# EAGLE board CT_schematic (EAGLE 7.6.0)

Size 100 x 80 mm. Coordinates in mm from the lower left corner, seen from the top.
Outline: 0,0 100,0 100,80 0,80 0,0
Copper layers (1*16): Top 0.035mm / dielectric 1.5mm / Bottom 0.035mm
Design rules "default": minimum track width 10mil, minimum drill 24mil, track to track 8mil, track to pad 8mil, pad to pad 8mil, via to via 8mil, smd to smd 8mil, copper to edge 40mil, drill to drill 8mil, minimum pad ring 10mil, minimum via ring 8mil, stop-mask expansion 4mil, vias tented up to drill 0mil, thermal gap 10mil

## Footprints (pad centres in the part's own frame; a part is rotated, then mirrored left to right if it is on the bottom)
C0603 = smd 0.8 x 0.8: 1 -0.762,0; 2 0.762,0
C0402 = smd 0.5 x 0.5: 1 -0.508,0; 2 0.508,0
C0805 = smd 1.2 x 1.3: 1 -1.016,0; 2 1.016,0
C1210 = smd 1.2 x 2.5: 1 -1.524,0; 2 1.524,0
R0603 = smd 0.8 x 0.8: 1 -0.762,0; 2 0.762,0
EXV-9H = smd 3.505 x 1.676: 1 -2.857,0; 2 2.857,0
L0603 = smd 0.8 x 0.8: 1 -0.762,0; 2 0.762,0
IND25X25CZ = smd 2.489 x 3.429: 1 -2.718,0; 2 2.718,0
PJ-037B_PACKAGE = drill 3.7 square: 1 12,0 | drill 3.2 square: 2 6,0
UFBGA100 = smd 0.28 x 0.28: A1 -2.75,2.75; A2 -2.25,2.75; A3 -1.75,2.75; A4 -1.25,2.75; A5 -0.75,2.75; A6 -0.25,2.75; A7 0.25,2.75; A8 0.75,2.75; A9 1.25,2.75; A10 1.75,2.75; A11 2.25,2.75; A12 2.75,2.75; B1 -2.75,2.25; B2 -2.25,2.25; B3 -1.75,2.25; B4 -1.25,2.25; B5 -0.75,2.25; B6 -0.25,2.25; B7 0.25,2.25; B8 0.75,2.25; B9 1.25,2.25; B10 1.75,2.25; B11 2.25,2.25; B12 2.75,2.25; C1 -2.75,1.75; C2 -2.25,1.75; C3 -1.75,1.75; C4 -1.25,1.75; C5 -0.75,1.75; C8 0.75,1.75; C9 1.25,1.75; C10 1.75,1.75; C11 2.25,1.75; C12 2.75,1.75; D1 -2.75,1.25; D2 -2.25,1.25; D3 -1.75,1.25; D10 1.75,1.25; D11 2.25,1.25; D12 2.75,1.25; E1 -2.75,0.75; E2 -2.25,0.75; E3 -1.75,0.75; E10 1.75,0.75; E11 2.25,0.75; E12 2.75,0.75; F1 -2.75,0.25; F2 -2.25,0.25; F11 2.25,0.25; F12 2.75,0.25; G1 -2.75,-0.25; G2 -2.25,-0.25; G11 2.25,-0.25; G12 2.75,-0.25; H1 -2.75,-0.75; H2 -2.25,-0.75; H3 -1.75,-0.75; H10 1.75,-0.75; H11 2.25,-0.75; H12 2.75,-0.75; J1 -2.75,-1.25; J2 -2.25,-1.25; J3 -1.75,-1.25; J10 1.75,-1.25; J11 2.25,-1.25; J12 2.75,-1.25; K1 -2.75,-1.75; K2 -2.25,-1.75; K3 -1.75,-1.75; K4 -1.25,-1.75; K5 -0.75,-1.75; K8 0.75,-1.75; K9 1.25,-1.75; K10 1.75,-1.75; K11 2.25,-1.75; K12 2.75,-1.75; L1 -2.75,-2.25; L2 -2.25,-2.25; L3 -1.75,-2.25; L4 -1.25,-2.25; L5 -0.75,-2.25; L6 -0.25,-2.25; L7 0.25,-2.25; L8 0.75,-2.25; L9 1.25,-2.25; L10 1.75,-2.25; L11 2.25,-2.25; L12 2.75,-2.25; M1 -2.75,-2.75; M2 -2.25,-2.75; M3 -1.75,-2.75; M4 -1.25,-2.75; M5 -0.75,-2.75; M6 -0.25,-2.75; M7 0.25,-2.75; M8 0.75,-2.75; M9 1.25,-2.75; M10 1.75,-2.75; M11 2.25,-2.75; M12 2.75,-2.75
SSOP-28 = smd 1.5 x 0.4: 1 -3.625,4.225; 2 -3.625,3.575; 3 -3.625,2.925; 4 -3.625,2.275; 5 -3.625,1.625; 6 -3.625,0.975; 7 -3.625,0.325; 8 -3.625,-0.325; 9 -3.625,-0.975; 10 -3.625,-1.625; 11 -3.625,-2.275; 12 -3.625,-2.925; 13 -3.625,-3.575; 14 -3.625,-4.225; 15 3.625,-4.225; 16 3.625,-3.575; 17 3.625,-2.925; 18 3.625,-2.275; 19 3.625,-1.625; 20 3.625,-0.975; 21 3.625,-0.325; 22 3.625,0.325; 23 3.625,0.975; 24 3.625,1.625; 25 3.625,2.275; 26 3.625,2.925; 27 3.625,3.575; 28 3.625,4.225
FCI_10118193-0001LF = smd 0.4 x 1.35: 1 -1.3,2.675; 2 -0.65,2.675; 3 0,2.675; 4 0.65,2.675; 5 1.3,2.675 | smd 1.6 x 1.4: 6 -3.2,2.45; 7 3.2,2.45 | smd 1.9 x 1.9: 8 -1.2,0; 9 1.2,0 | hole 0.5: -3.3,0; 3.3,0
SAMTEC_FTSH-105-01-L-DV-K = smd 0.762 x 2.794: 1 -2.54,-2.032; 2 -2.54,2.032; 3 -1.27,-2.032; 4 -1.27,2.032; 5 0,-2.032; 6 0,2.032; 7 1.27,-2.032; 8 1.27,2.032; 9 2.54,-2.032; 10 2.54,2.032
VFBGA-63 = smd 0.4 x 0.4: A1 -3.6,4.4; A2 -2.8,4.4; A9 2.8,4.4; A10 3.6,4.4; B1 -3.6,3.6; B9 2.8,3.6; B10 3.6,3.6; C3 -2,2.8; C4 -1.2,2.8; C5 -0.4,2.8; C6 0.4,2.8; C7 1.2,2.8; C8 2,2.8; D3 -2,2; D4 -1.2,2; D5 -0.4,2; D6 0.4,2; D7 1.2,2; D8 2,2; E3 -2,1.2; E4 -1.2,1.2; E5 -0.4,1.2; E6 0.4,1.2; E7 1.2,1.2; E8 2,1.2; F3 -2,0.4; F4 -1.2,0.4; F5 -0.4,0.4; F6 0.4,0.4; F7 1.2,0.4; F8 2,0.4; G3 -2,-0.4; G4 -1.2,-0.4; G5 -0.4,-0.4; G6 0.4,-0.4; G7 1.2,-0.4; G8 2,-0.4; H3 -2,-1.2; H4 -1.2,-1.2; H5 -0.4,-1.2; H6 0.4,-1.2; H7 1.2,-1.2; H8 2,-1.2; J3 -2,-2; J4 -1.2,-2; J5 -0.4,-2; J6 0.4,-2; J7 1.2,-2; J8 2,-2; K3 -2,-2.8; K4 -1.2,-2.8; K5 -0.4,-2.8; K6 0.4,-2.8; K7 1.2,-2.8; K8 2,-2.8; L1 -3.6,-3.6; L2 -2.8,-3.6; L9 2.8,-3.6; L10 3.6,-3.6; M1 -3.6,-4.4; M2 -2.8,-4.4; M9 2.8,-4.4; M10 3.6,-4.4
QFN65P400X400X100-17N = smd 1.016 x 0.356: 1 -1.803,0.965; 2 -1.803,0.33; 3 -1.803,-0.33; 4 -1.803,-0.965; 9 1.803,-0.965; 10 1.803,-0.33; 11 1.803,0.33; 12 1.803,0.965 | smd 0.356 x 1.016: 5 -0.965,-1.803; 6 -0.33,-1.803; 7 0.33,-1.803; 8 0.965,-1.803; 13 0.965,1.803; 14 0.33,1.803; 15 -0.33,1.803; 16 -0.965,1.803 | smd 2.108 x 2.108: 17 0,0
HTSS-105-01-G-D = drill 1 pad 1.8 square: 1 0,0 | drill 1 pad 1.8: 2 0,2.54; 3 2.54,0; 4 2.54,2.54; 5 5.08,0; 6 5.08,2.54; 7 7.62,0; 8 7.62,2.54; 9 10.16,0; 10 10.16,2.54
ABLS-25.000MHZ-B2F-T = smd 5.6 x 2.8: 1 -3.81,0; 2 5.69,0
ASEK = smd 1.4 x 1: 1 -1.1,-0.8; 2 1.1,-0.8; 3 1.1,0.8; 4 -1.1,0.8
ASFL1 = smd 1.7 x 1.5: 1 -1.27,-1.1; 2 1.27,-1.1; 3 1.27,1.1; 4 -1.27,1.1
IR3899MTR1PBF = smd 0.25 x 0.75: 1 0,0; 2 0.5,0; 3 1,0; 4 1.5,0; 5 2,0; 6 2.5,0; 7 3,0 | smd 0.75 x 0.25: 8 3.425,0.78; 9 3.425,1.28; 10 3.425,1.78; 14 -0.425,1.78; 15 -0.425,1.28; 16 -0.425,0.78 | smd 0.3 x 1.95: 11 3.22,3.63 | smd 1.62 x 2.42: 12 1.786,3.8 | smd 1 x 1.95: 13 0.117,3.63 | smd 2.19 x 1.25: 17 1.51,1.26
SON-6 = smd 0.55 x 0.3: 1 -0.355,0.5 | smd 0.52 x 0.3: 2 -0.37,0; 3 -0.37,-0.5; 4 0.37,-0.5; 5 0.37,0; 6 0.37,0.5
SW_4-1437565-2 = smd 1.4 x 2.1: 1 -2.23,4.55; 2 -2.23,-4.55; 3 2.23,4.55; 4 2.23,-4.55
LGM67K-G1J2-24-Z = smd 0.8 x 1.4: A -2,0; C 0,0
NC7SZ125M5X = smd 1.3 x 0.7: 1 -1.3,0.95; 2 -1.3,0; 3 -1.3,-0.95; 4 1.3,-0.95; 5 1.3,0.95

## Placement (x,y rotation side)
C1  1e-06  [C0603]  -71.12,73.66 0 top  (outside the outline)
C2  1e-07  [C0603]  -74.93,73.66 0 top  (outside the outline)
C3  1e-07  [C0603]  -78.74,73.66 0 top  (outside the outline)
C4  1e-07  [C0603]  -15.24,78.74 0 top  (outside the outline)
C5  1e-07  [C0603]  -19.05,78.74 0 top  (outside the outline)
C6  1e-07  [C0603]  -22.86,78.74 0 top  (outside the outline)
C7  1e-07  [C0603]  -26.67,78.74 0 top  (outside the outline)
C8  4.7e-06  [C0603]  -59.69,73.66 0 top  (outside the outline)
C9  1e-08  [C0603]  -30.48,78.74 0 top  (outside the outline)
C10  1e-06  [C0603]  -34.29,78.74 0 top  (outside the outline)
C11  1e-11  [C0402]  -80.01,78.74 0 top  (outside the outline)
C12  1e-11  [C0402]  -15.24,83.82 0 top  (outside the outline)
C13  1e-07  [C0402]  -19.05,83.82 0 top  (outside the outline)
C14  4.7e-06  [C0805]  -34.29,62.23 0 top  (outside the outline)
C15  1e-07  [C0402]  -22.86,83.82 0 top  (outside the outline)
C16  1e-07  [C0402]  -26.67,83.82 0 top  (outside the outline)
C17  1e-07  [C0402]  -30.48,83.82 0 top  (outside the outline)
C18  1e-07  [C0402]  -34.29,83.82 0 top  (outside the outline)
C19  1e-07  [C0402]  -38.1,83.82 0 top  (outside the outline)
C20  1e-07  [C0402]  -41.91,83.82 0 top  (outside the outline)
C21  1e-07  [C0402]  -45.72,83.82 0 top  (outside the outline)
C22  2.2e-06  [C0603]  -63.5,73.66 0 top  (outside the outline)
C23  1e-07  [C0402]  -49.53,83.82 0 top  (outside the outline)
C24  1e-07  [C0402]  -53.34,83.82 0 top  (outside the outline)
C25  1e-06  [C0603]  -38.1,78.74 0 top  (outside the outline)
C26  1e-08  [C0402]  -57.15,83.82 0 top  (outside the outline)
C27  1e-08  [C0402]  -60.96,83.82 0 top  (outside the outline)
C28  0.0001  [C1210]  -16.51,63.5 0 top  (outside the outline)
C29  2.2e-06  [C0603]  -67.31,73.66 0 top  (outside the outline)
C30  1e-07  [C0402]  -64.77,83.82 0 top  (outside the outline)
C31  1e-07  [C0402]  -68.58,83.82 0 top  (outside the outline)
C32  8.6453388913681e-09  [R0603]  -44.45,62.23 0 top  (outside the outline)
C33  2.9472746220573e-07  [R0603]  -54.61,62.23 0 top  (outside the outline)
C36  1e-07  [C0402]  -72.39,83.82 0 top  (outside the outline)
C37  0.0001  [EXV-9H]  -17.78,55.88 0 top  (outside the outline)
C38  0.0001  [EXV-9H]  -29.21,55.88 0 top  (outside the outline)
C39  1e-08  [C0402]  -76.2,83.82 0 top  (outside the outline)
C40  1e-08  [C0402]  -80.01,83.82 0 top  (outside the outline)
F1  240.0  [L0603]  -41.91,78.74 0 top  (outside the outline)
I1  6.8e-07  [IND25X25CZ]  -59.69,55.88 0 top  (outside the outline)
J1  PJ-037B  [PJ-037B_PACKAGE]  -57.15,22.86 0 top  (outside the outline)
R2  1000.0  [R0603]  -45.72,78.74 0 top  (outside the outline)
R4  4700.0  [R0603]  -49.53,78.74 0 top  (outside the outline)
R6  2200.0  [R0603]  -53.34,78.74 0 top  (outside the outline)
R7  10000.0  [R0603]  -34.29,68.58 0 top  (outside the outline)
R8  4700.0  [R0603]  -57.15,78.74 0 top  (outside the outline)
R9  10000.0  [R0603]  -39.37,68.58 0 top  (outside the outline)
R10  10000.0  [R0603]  -44.45,68.58 0 top  (outside the outline)
R11  10000.0  [R0603]  -49.53,68.58 0 top  (outside the outline)
R12  10000.0  [R0603]  -54.61,68.58 0 top  (outside the outline)
R13  10000.0  [R0603]  -59.69,68.58 0 top  (outside the outline)
R14  10000.0  [R0603]  -64.77,68.58 0 top  (outside the outline)
R15  5.0  [R0603]  -60.96,78.74 0 top  (outside the outline)
R16  10000.0  [R0603]  -69.85,68.58 0 top  (outside the outline)
R17  10000.0  [R0603]  -74.93,68.58 0 top  (outside the outline)
R18  10000.0  [R0603]  -15.24,73.66 0 top  (outside the outline)
R19  10000.0  [R0603]  -20.32,73.66 0 top  (outside the outline)
R20  10000.0  [R0603]  -25.4,73.66 0 top  (outside the outline)
R21  10000.0  [R0603]  -30.48,73.66 0 top  (outside the outline)
R22  10000.0  [R0603]  -35.56,73.66 0 top  (outside the outline)
R23  47.0  [R0603]  -64.77,78.74 0 top  (outside the outline)
R24  0.1  [R0603]  -68.58,78.74 0 top  (outside the outline)
R25  4030.2416170974  [R0603]  -62.23,62.23 0 top  (outside the outline)
R26  719.68600305311  [R0603]  -69.85,62.23 0 top  (outside the outline)
R27  58.964311377246  [R0603]  -77.47,62.23 0 top  (outside the outline)
R28  130.0  [R0603]  -72.39,78.74 0 top  (outside the outline)
R29  39000.0  [R0603]  -40.64,73.66 0 top  (outside the outline)
R30  49900.0  [R0603]  -45.72,73.66 0 top  (outside the outline)
R31  5181.6688741722  [R0603]  -19.05,68.58 0 top  (outside the outline)
R32  10000.0  [R0603]  -50.8,73.66 0 top  (outside the outline)
R33  10000.0  [R0603]  -55.88,73.66 0 top  (outside the outline)
R34  9100.0  [R0603]  -76.2,78.74 0 top  (outside the outline)
R35  680000.0  [R0603]  -24.13,68.58 0 top  (outside the outline)
R36  120000.0  [R0603]  -29.21,68.58 0 top  (outside the outline)
U1  STM32F303VEH7  [UFBGA100]  -44.45,35.56 0 top  (outside the outline)
U2  FT232RL-REEL  [SSOP-28]  -48.26,7.62 0 top  (outside the outline)
U3  10118193-0001LF  [FCI_10118193-0001LF]  -53.34,45.72 0 top  (outside the outline)
U4  FTSH-105-01-L-DV-K  [SAMTEC_FTSH-105-01-L-DV-K]  -35.56,22.86 0 top  (outside the outline)
U5  mt29f4g08abadah4  [VFBGA-63]  -63.5,21.59 0 top  (outside the outline)
U6  TSC2013QRSARQ1  [QFN65P400X400X100-17N]  -35.56,7.62 0 top  (outside the outline)
U7  HTSS-105-01-G-D  [HTSS-105-01-G-D]  -27.94,45.72 0 top  (outside the outline)
U8  ABLS-25.000MHZ-B2F-T  [ABLS-25.000MHZ-B2F-T]  -48.26,55.88 0 top  (outside the outline)
U9  ASEK-32.768KHz-ECST  [ASEK]  -74.93,45.72 0 top  (outside the outline)
U10  ASFL1-12MHZ-NCS  [ASFL1]  -44.45,45.72 0 top  (outside the outline)
U11  IR3899MTR1PBF  [IR3899MTR1PBF]  -60.96,33.02 0 top  (outside the outline)
U12  TPS3895ADRYR  [SON-6]  -13.97,87.63 0 top  (outside the outline)
U13  4-1437565-2  [SW_4-1437565-2]  -27.94,35.56 0 top  (outside the outline)
U14  Q65110A2395  [LGM67K-G1J2-24-Z]  -68.58,55.88 0 top  (outside the outline)
U15  nc7sz125m5x  [NC7SZ125M5X]  -21.59,62.23 0 top  (outside the outline)
U16  nc7sz125m5x  [NC7SZ125M5X]  -27.94,62.23 0 top  (outside the outline)

## Library data of the parts
C1-C33 C36-C40 F1 I1 J1 R2 R4 R6-R36 U1-U16 = circuit_tree

## Nets
CLK_CRYSTAL_U1_F1: C11.1 U1.F1 U8.1
CLK_CRYSTAL_U1_G1: C12.1 U1.G1 U8.2
CLK_U1_D1: U1.D1 U9.3
CLK_U2_27: U2.27 U10.3
GND: C1.2 C2.2 C3.2 C4.2 C5.2 C6.2 C7.2 C8.2 C9.2 C10.2 C11.2 C12.2 C13.2 C14.2 C15.2 C16.2 C17.2 C18.2 C19.2 C20.2 C21.2 C22.2 C26.2 C27.2 C29.2 C30.2 C31.2 C36.2 C37.2 C38.2 C39.2 C40.2 J1.2 R2.2 R7.2 R10.2 R14.2 R15.2 R24.1 R24.2 R26.2 R29.2 R31.2 R34.2 R36.2 U1.D3 U1.E3 U1.F11 U1.F12 U1.K1 U2.7 U2.18 U2.21 U2.25 U2.26 U3.5 U3.6 U3.7 U3.8 U3.9 U4.3 U4.5 U5.C5 U5.F7 U5.K3 U5.K8 U6.17 U7.9 U9.2 U10.2 U11.4 U11.11 U11.17 U12.2 U14.C U15.2 U15.3 U16.1 U16.3
NET_U1_A4: R7.1 U1.A4
NET_U1_B3: R6.1 U1.B3 U6.1
NET_U1_H2: R4.1 U1.H2 U16.4
NET_U1_L1: C9.1 C10.1 F1.1 U1.L1 U1.M1
NET_U1_M11: U14.A
NET_U1_M12: U13.3 U13.4
NET_U2_14: R9.1 U2.14
NET_U2_17: C15.1 U2.17
NET_U2_19: R10.1 U2.19
NET_U3_1: R8.1 U3.1
NET_U3_2: U2.16 U3.2
NET_U3_3: U2.15 U3.3
NET_U3_19: R8.2
NET_U4_9: R15.1 U4.9
NET_U5_C3: R20.1 U5.C3
NET_U6_4: R22.1 U6.4
NET_U6_5: R21.1 U6.5
NET_U6_9: C23.2 C24.2 C25.2 R23.2 U6.9
NET_U6_15: R23.1 U6.8 U6.15
NET_U7_3: U6.12 U7.3
NET_U7_4: U6.14 U7.4
NET_U7_5: U6.11 U7.5
NET_U7_6: U6.13 U7.6
NET_U11_1: C32.1 R25.1 R26.1 R27.1 R28.1 U11.1 U11.8
NET_U11_2: C31.1 U11.2
NET_U11_3: C32.2 C33.1 C33.2 U11.3
NET_U11_5: R29.1 U11.5
NET_U11_10: C29.1 U11.10
NET_U11_12: C28.1 I1.1 U11.12
NET_U11_13: U11.13
NET_U11_14: C28.2 U11.14
NET_U11_15: R30.1 R31.1 U11.15
NET_U11_ATNET_3: I1.2 R25.2
NET_U11_ATNET_4: C33.2 R27.2
NET_U11_ATNET_5: R28.2
NET_U12_1: R33.1 R34.1 U12.1
NET_U12_3: R35.2 R36.1 U12.3
NET_U12_4: R32.1 U12.4 U15.4 U16.2
NET_U13_1: R2.1 U13.1 U13.2
PROC_FMC_D0: U1.H11 U5.H4
PROC_FMC_D1: U1.H10 U5.J4
PROC_FMC_D2: U1.C9 U5.K4
PROC_FMC_D3: U1.B9 U5.K5
PROC_FMC_D4: U1.M7 U5.K6
PROC_FMC_D5: U1.L7 U5.J7
PROC_FMC_D6: U1.M8 U5.K7
PROC_FMC_D7: U1.L8 U5.J8
PROC_FMC_NCE2: R17.1 U1.A5 U5.C6
PROC_FMC_NOE: R19.1 U1.B7 U5.D4
PROC_FMC_NWAIT: R16.1 U1.B6 U5.C8
PROC_FMC_NWE: R18.1 U1.A6 U5.C7
PROC_SYS_JTCK_SWCLK: R14.1 U1.A10 U4.4
PROC_SYS_JTDI: R12.1 U1.A9 U4.8
PROC_SYS_JTDO_TRACESWO: U1.A8 U4.6
PROC_SYS_JTMS_SWDIO: R13.1 U1.A11 U4.2
PROC_UART4_RX: U1.C10 U2.1
PROC_UART4_TX: U1.B11 U2.5
RST_OUT_U4_JTAG_RST_B: R11.1 U4.10 U15.1
VCC_S1_16V7: C30.1 C37.1 C38.1 J1.1 R30.2 U11.9
VCC_TIER1_3V3: C1.1 C2.1 C3.1 C4.1 C5.1 C6.1 C7.1 C8.1 C13.1 C14.1 C16.1 C17.1 C18.1 C19.1 C20.1 C21.1 C22.1 C23.1 C24.1 C25.1 C26.1 C27.1 C36.1 C39.1 C40.1 F1.2 I1.2 R4.2 R6.2 R9.2 R11.2 R12.2 R13.2 R16.2 R17.2 R18.2 R19.2 R20.2 R21.2 R22.2 R25.2 R32.2 R33.2 R35.1 U1.C4 U1.E2 U1.G11 U1.G12 U1.H3 U2.4 U2.20 U4.1 U5.D3 U5.G4 U5.H8 U5.J6 U6.7 U6.10 U9.4 U10.4 U12.6 U15.5 U16.5

## Tracks (layer width: path | path; a pad name or v marks a point on that pad's centre or on a via)
CLK_CRYSTAL_U1_F1  (2 unrouted)
CLK_CRYSTAL_U1_G1  (2 unrouted)
CLK_U1_D1  (1 unrouted)
CLK_U2_27  (1 unrouted)
GND  (78 unrouted)
NET_U1_A4  (1 unrouted)
NET_U1_B3  (2 unrouted)
NET_U1_H2  (2 unrouted)
NET_U1_L1  (4 unrouted)
NET_U1_M12  (1 unrouted)
NET_U2_14  (1 unrouted)
NET_U2_17  (1 unrouted)
NET_U2_19  (1 unrouted)
NET_U3_1  (1 unrouted)
NET_U3_2  (1 unrouted)
NET_U3_3  (1 unrouted)
NET_U4_9  (1 unrouted)
NET_U5_C3  (1 unrouted)
NET_U6_4  (1 unrouted)
NET_U6_5  (1 unrouted)
NET_U6_9  (4 unrouted)
NET_U6_15  (2 unrouted)
NET_U7_3  (1 unrouted)
NET_U7_4  (1 unrouted)
NET_U7_5  (1 unrouted)
NET_U7_6  (1 unrouted)
NET_U11_1  (6 unrouted)
NET_U11_2  (1 unrouted)
NET_U11_3  (3 unrouted)
NET_U11_5  (1 unrouted)
NET_U11_10  (1 unrouted)
NET_U11_12  (2 unrouted)
NET_U11_14  (1 unrouted)
NET_U11_15  (2 unrouted)
NET_U11_ATNET_3  (1 unrouted)
NET_U11_ATNET_4  (1 unrouted)
NET_U12_1  (2 unrouted)
NET_U12_3  (2 unrouted)
NET_U12_4  (3 unrouted)
NET_U13_1  (2 unrouted)
PROC_FMC_D0  (1 unrouted)
PROC_FMC_D1  (1 unrouted)
PROC_FMC_D2  (1 unrouted)
PROC_FMC_D3  (1 unrouted)
PROC_FMC_D4  (1 unrouted)
PROC_FMC_D5  (1 unrouted)
PROC_FMC_D6  (1 unrouted)
PROC_FMC_D7  (1 unrouted)
PROC_FMC_NCE2  (2 unrouted)
PROC_FMC_NOE  (2 unrouted)
PROC_FMC_NWAIT  (2 unrouted)
PROC_FMC_NWE  (2 unrouted)
PROC_SYS_JTCK_SWCLK  (2 unrouted)
PROC_SYS_JTDI  (2 unrouted)
PROC_SYS_JTDO_TRACESWO  (1 unrouted)
PROC_SYS_JTMS_SWDIO  (2 unrouted)
PROC_UART4_RX  (1 unrouted)
PROC_UART4_TX  (1 unrouted)
RST_OUT_U4_JTAG_RST_B  (2 unrouted)
VCC_S1_16V7  (5 unrouted)
VCC_TIER1_3V3  (62 unrouted)